# Altium PCB ife19_TS_BMS_v2.PcbDoc
Units mm, origin at the board's own origin, x right, y up, seen from the top; angles counter-clockwise.
Board outline 420 x 70 mm, 2 copper layers (Top Layer, Bottom Layer); 2 components, 3 nets, 90 pads, 0 vias.
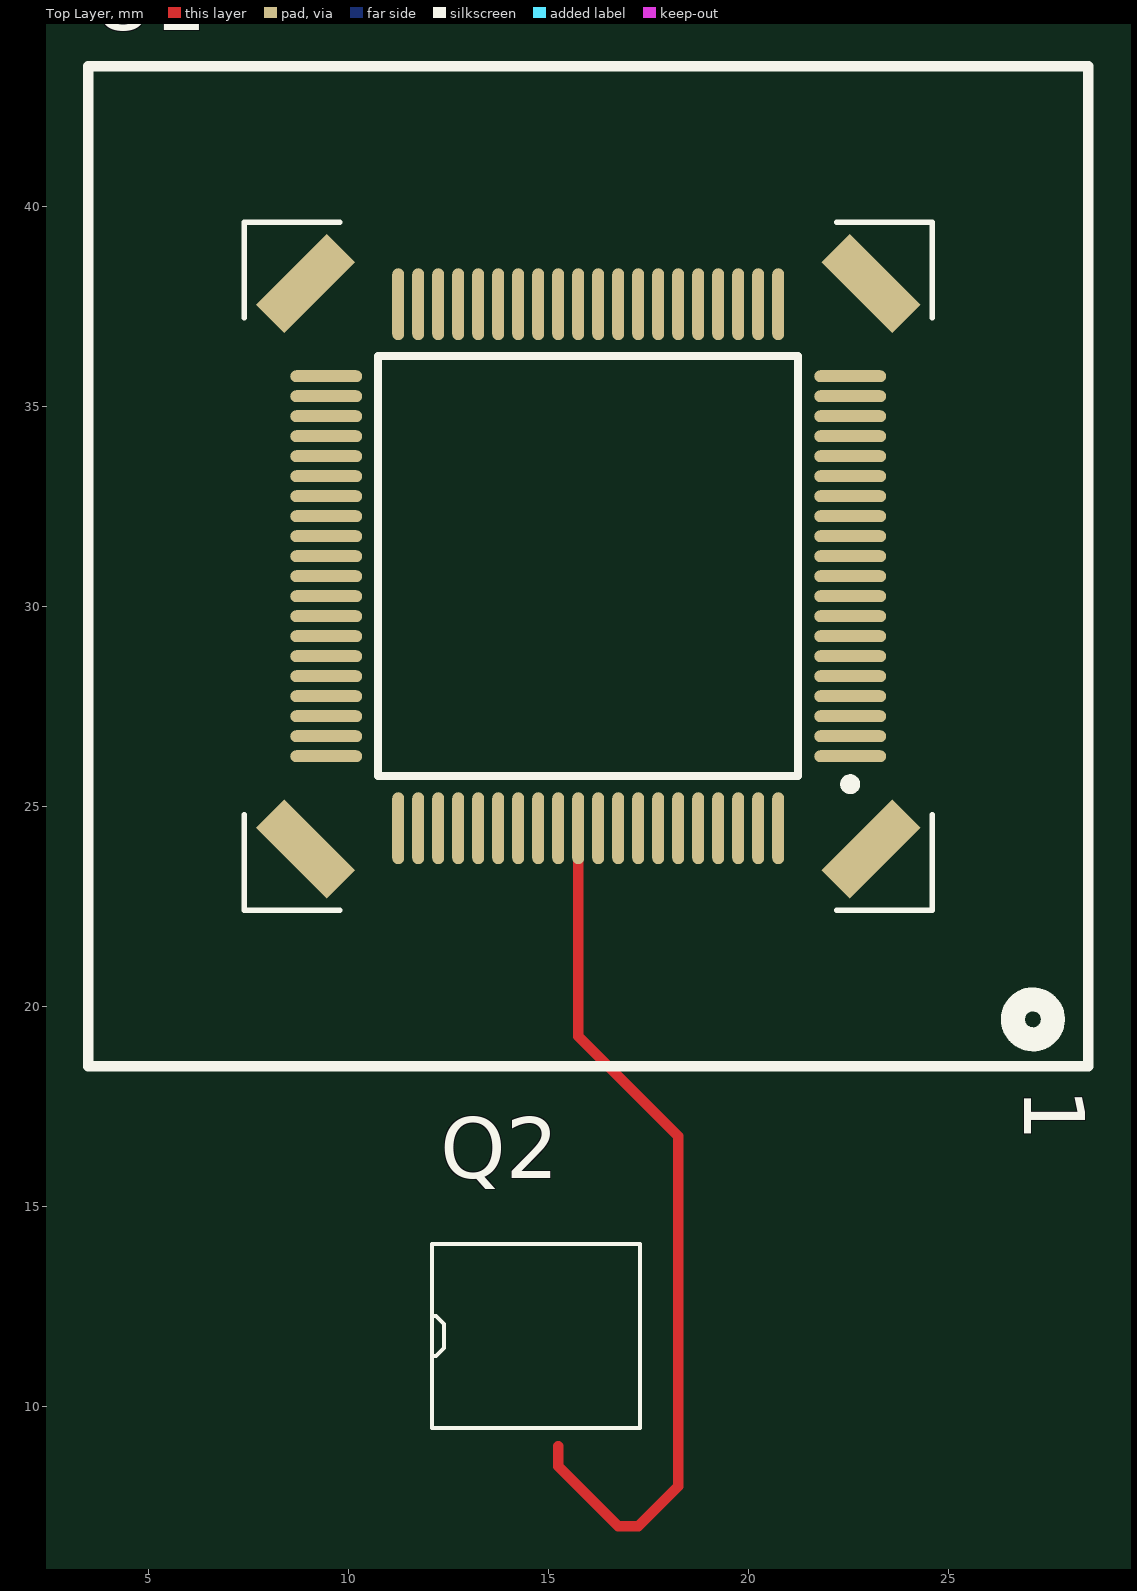
[diagram p0: Top Layer view]
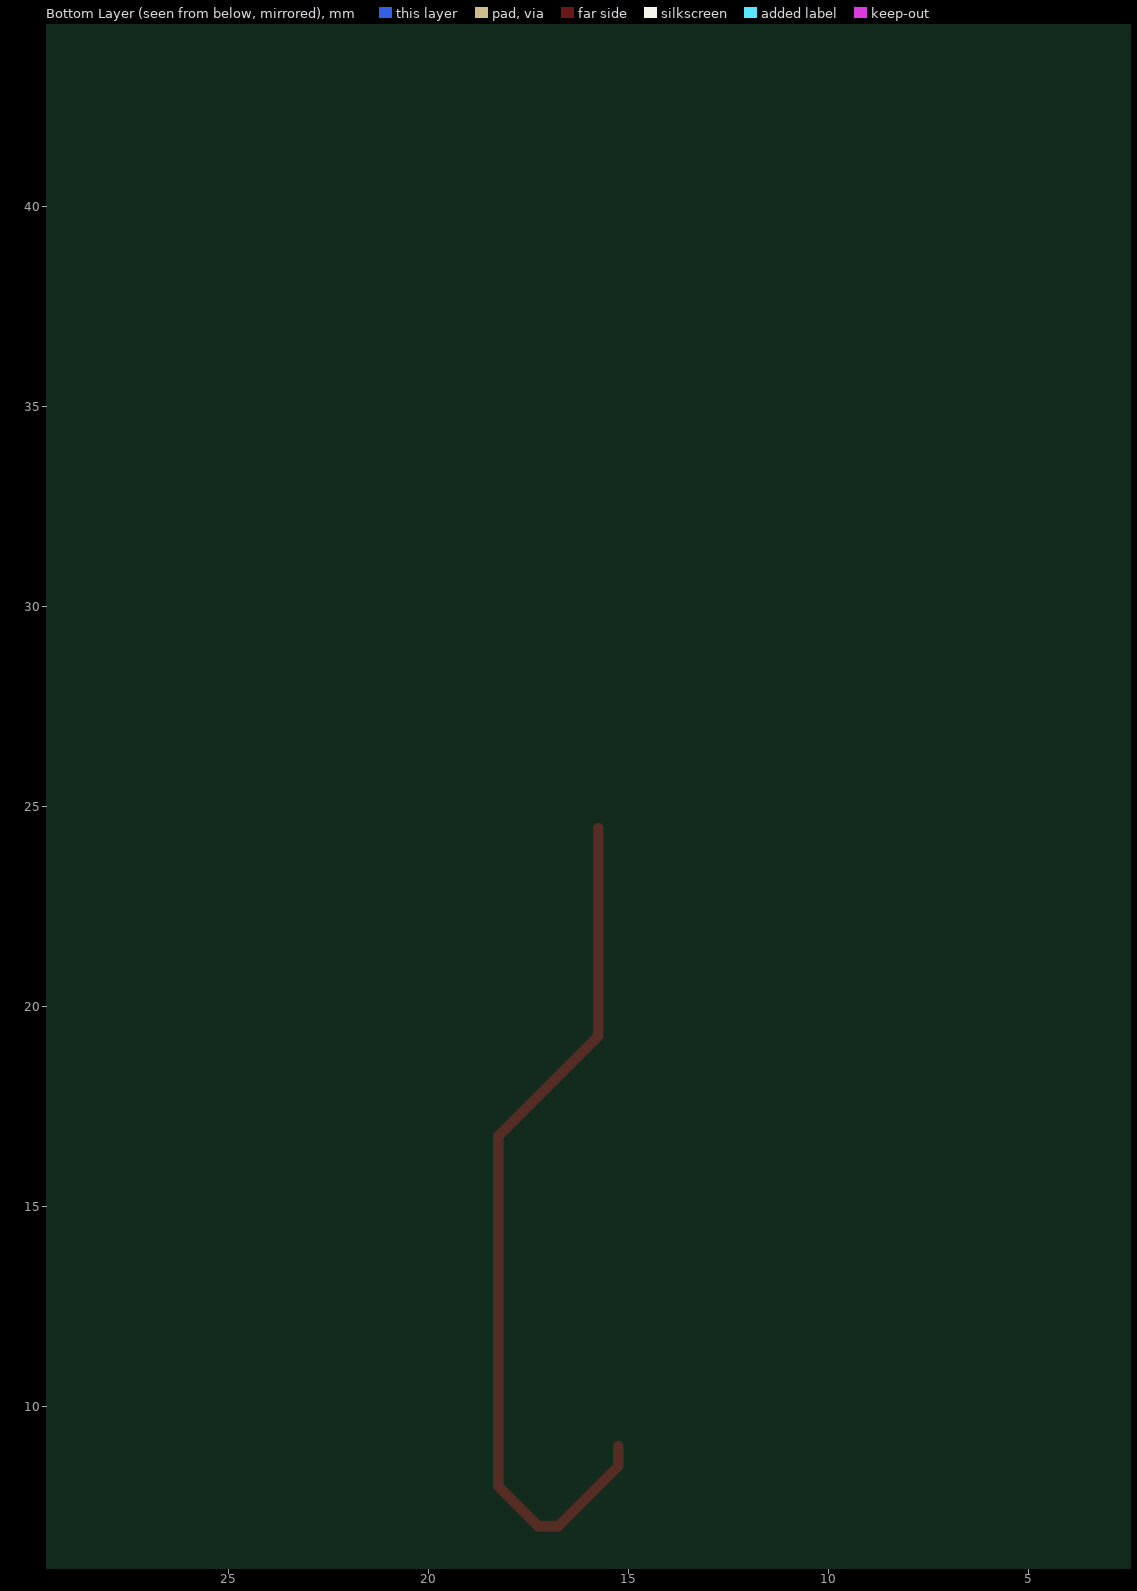
[diagram p1: Bottom Layer view, seen from below]

## Layer stack, top to bottom
Top Solder: solder mask 0.0102, Solder Resist, Dk 3.5
Top Layer: signal copper 0.0356
Dielectric 1: dielectric 0.32, FR-4, Dk 4.8
Bottom Layer: signal copper 0.0356
Bottom Solder: solder mask 0.0102, Solder Resist, Dk 3.5

## Board outline
0,0 0,70 420,70 420,0

## Design rules (kind name [scope] priority, off if disabled: settings)
Clearance [All] p1: gap=0.254 ignorepadtopadclearanceinfootprint=FALSE except(0: Arc-Hole Track-Hole SMDPad-Hole THPad-Hole Via-Hole Fill-Hole Poly-Hole Region-Hole Text-Hole)
PolygonConnect [All] p1: connectstyle=Relief reliefconductorwidth=0.254 reliefentries=4 polygonreliefangle="90 Angle" airgapwidth=0.254
RoomDefinition ife19_TS_BMS_v2 [InComponentClass('ife19_TS_BMS_v2')] p1: confinementstyle=ConfineIn formatcopy=TRUE lockcomponents=FALSE outline 1.814,1.75 74.585,1.75 74.585,46.835 1.814,46.835
RoutingVias [All] p1: holewidth=0.711 width=1.27 viastyle="Through Hole" minholewidth=0.711 minwidth=1.27 maxholewidth=0.711 maxwidth=1.27
SolderMaskExpansion [All] p1: expansion=0.102
Width [All] p1: maxlimit=0.254 minlimit=0.254 preferedwidth=0.254
30 further rules are at their usual default settings.

## Components (designator, comment, footprint, x,y, rotation, side; value= is the part's Value field where it differs from the comment)
Q2 "PHPT610030NK" LFPAK-56-8 14.7,11.75 r0 top
U1 "bq76PL455TPFCQ1" 455D-socket 16,31 r0 top

## Footprints (in the part's own frame and the unit in brackets; to place one, negate y for a bottom-side part, rotate by r counter-clockwise, add the part's x,y. Pads: shape width x height; smd on the part's side, far side on the other; paste and mask are expansions set on the pad)
455D-socket [mm] "Dual footprint for socket with ability to also solder part."
  oval 1.8x0.3 smd: 1(6.55,-4.75) 2(6.55,-4.25) 3(6.55,-3.75) 4(6.55,-3.25) 5(6.55,-2.75) 6(6.55,-2.25) 7(6.55,-1.75) 8(6.55,-1.25) 9(6.55,-0.75) 10(6.55,-0.25) 11(6.55,0.25) 12(6.55,0.75) 13(6.55,1.25) 14(6.55,1.75) 15(6.55,2.25) 16(6.55,2.75) 17(6.55,3.25) 18(6.55,3.75) 19(6.55,4.25) 20(6.55,4.75) 41(-6.55,4.75) 42(-6.55,4.25) 43(-6.55,3.75) 44(-6.55,3.25) 45(-6.55,2.75) 46(-6.55,2.25) 47(-6.55,1.75) 48(-6.55,1.25) 49(-6.55,0.75) 50(-6.55,0.25) 51(-6.55,-0.25) 52(-6.55,-0.75) 53(-6.55,-1.25) 54(-6.55,-1.75) 55(-6.55,-2.25) 56(-6.55,-2.75) 57(-6.55,-3.25) 58(-6.55,-3.75) 59(-6.55,-4.25) 60(-6.55,-4.75)
  oval 0.3x1.8 smd: 21(4.75,6.55) 22(4.25,6.55) 23(3.75,6.55) 24(3.25,6.55) 25(2.75,6.55) 26(2.25,6.55) 27(1.75,6.55) 28(1.25,6.55) 29(0.75,6.55) 30(0.25,6.55) 31(-0.25,6.55) 32(-0.75,6.55) 33(-1.25,6.55) 34(-1.75,6.55) 35(-2.25,6.55) 36(-2.75,6.55) 37(-3.25,6.55) 38(-3.75,6.55) 39(-4.25,6.55) 40(-4.75,6.55) 61(-4.75,-6.55) 62(-4.25,-6.55) 63(-3.75,-6.55) 64(-3.25,-6.55) 65(-2.75,-6.55) 66(-2.25,-6.55) 67(-1.75,-6.55) 68(-1.25,-6.55) 69(-0.75,-6.55) 70(-0.25,-6.55) 71(0.25,-6.55) 72(0.75,-6.55) 73(1.25,-6.55) 74(1.75,-6.55) 75(2.25,-6.55) 76(2.75,-6.55) 77(3.25,-6.55) 78(3.75,-6.55) 79(4.25,-6.55) 80(4.75,-6.55)
  rect 1x2.5 smd rot 45: ""(-7.071,-7.071) ""(7.071,7.071)
  rect 1x2.5 smd rot 135: ""(-7.071,7.071) ""(7.071,-7.071)
  silkscreen extent -12.5,-12.5 12.5,12.5, body extent -6,-6 6,6, height 1.2
LFPAK-56-8 [mm] "Power SO-8 package from Nexperia"
  rrect20% 0.7x1.15 on Top Solder: B1(-0.635,-3.275) B2(1.905,-3.275) E1(-1.905,-3.275) E2(0.635,-3.275)
  rrect20% 1.97x5.4 on Top Solder: C1(-1.27,0.5) C2(1.27,0.5)
  silkscreen extent -2.6,-2.3 2.6,2.3, body extent -2.6,-3.56 2.55,2.6, height 1.27

## Part data
Q2: "Dual BJT 100V, 3A, hfe>250 / Nexperia", Manufacturer=Nexperia, MouserPartNumber=PHPT610030NKX, Supplier Part Number 1=771-PHPT610030NKX, CompType="Used in BOM Report", MountingType=SMT, Supplier 1=Mouser
U1: library part bq76PL455, "16 Cell Battery Stack Monitor with Passive Cell Balancing", Manufacturer="Texas Instruments", ComponentLink1Description="Datasheet Link", CompType="Used in BOM report", MountType=SMT, PackageReference=VHB80A, PartNumber=bq76PL455TPFCQ1, RoHS=Y, SymbolCreator="Use LDAP id", SymbolVersion="use current date i.e. 2008-05-20"

## Nets (pads, with @x,y where several pads share a name; then routed paths per layer and width w, separated by ;. In a path a pad name is that pad's centre, name@x,y a point inside that pad or via, vN(x,y) a via of type N, cw(c..) or ccw(c..) an arc to the next point about the centre after c; other vN are vias at no path point)
NetQ2_B2: U1.71
NetQ2_C2: U1.76
NetQ2_E2: U1.70 | length 22
  Top Layer w0.254: 15.25,9 15.25,8.5 16.75,7 17.25,7 18.25,8 18.25,16.75 15.75,19.25 U1.70
pads on no net: Q2.B1 Q2.B2 Q2.C1 Q2.C2 Q2.E1 Q2.E2 U1. U1.1 U1.2 U1.3 U1.4 U1.5 U1.6 U1.7 U1.8 U1.9 U1.10 U1.11 U1.12 U1.13 U1.14 U1.15 U1.16 U1.17 U1.18 U1.19 U1.20 U1.21 U1.22 U1.23 U1.24 U1.25 U1.26 U1.27 U1.28 U1.29 U1.30 U1.31 U1.32 U1.33 U1.34 U1.35 U1.36 U1.37 U1.38 U1.39 U1.40 U1.41 U1.42 U1.43 U1.44 U1.45 U1.46 U1.47 U1.48 U1.49 U1.50 U1.51 U1.52 U1.53 U1.54 U1.55 U1.56 U1.57 U1.58 U1.59 U1.60 U1.61 U1.62 U1.63 U1.64 U1.65 U1.66 U1.67 U1.68 U1.69 U1.72 U1.73 U1.74 U1.75 U1.77 U1.78 U1.79 U1.80

## Text inside footprints (layer, text, board x,y; h text height)
U1: Top Overlay "1" at 26.897,17.944 h1.52 r270